# Altium PCB 0D1_(L293D).PcbDoc
Units mm, origin at the board's own origin, x right, y up, seen from the top; angles counter-clockwise.
Board outline 152.4 x 101.6 mm, 2 copper layers (Top Layer, Bottom Layer), stack 0.325 mm thick; 36 components, 27 nets, 87 pads, 5 vias.
Unrouted connection lines stored in the file: 3.
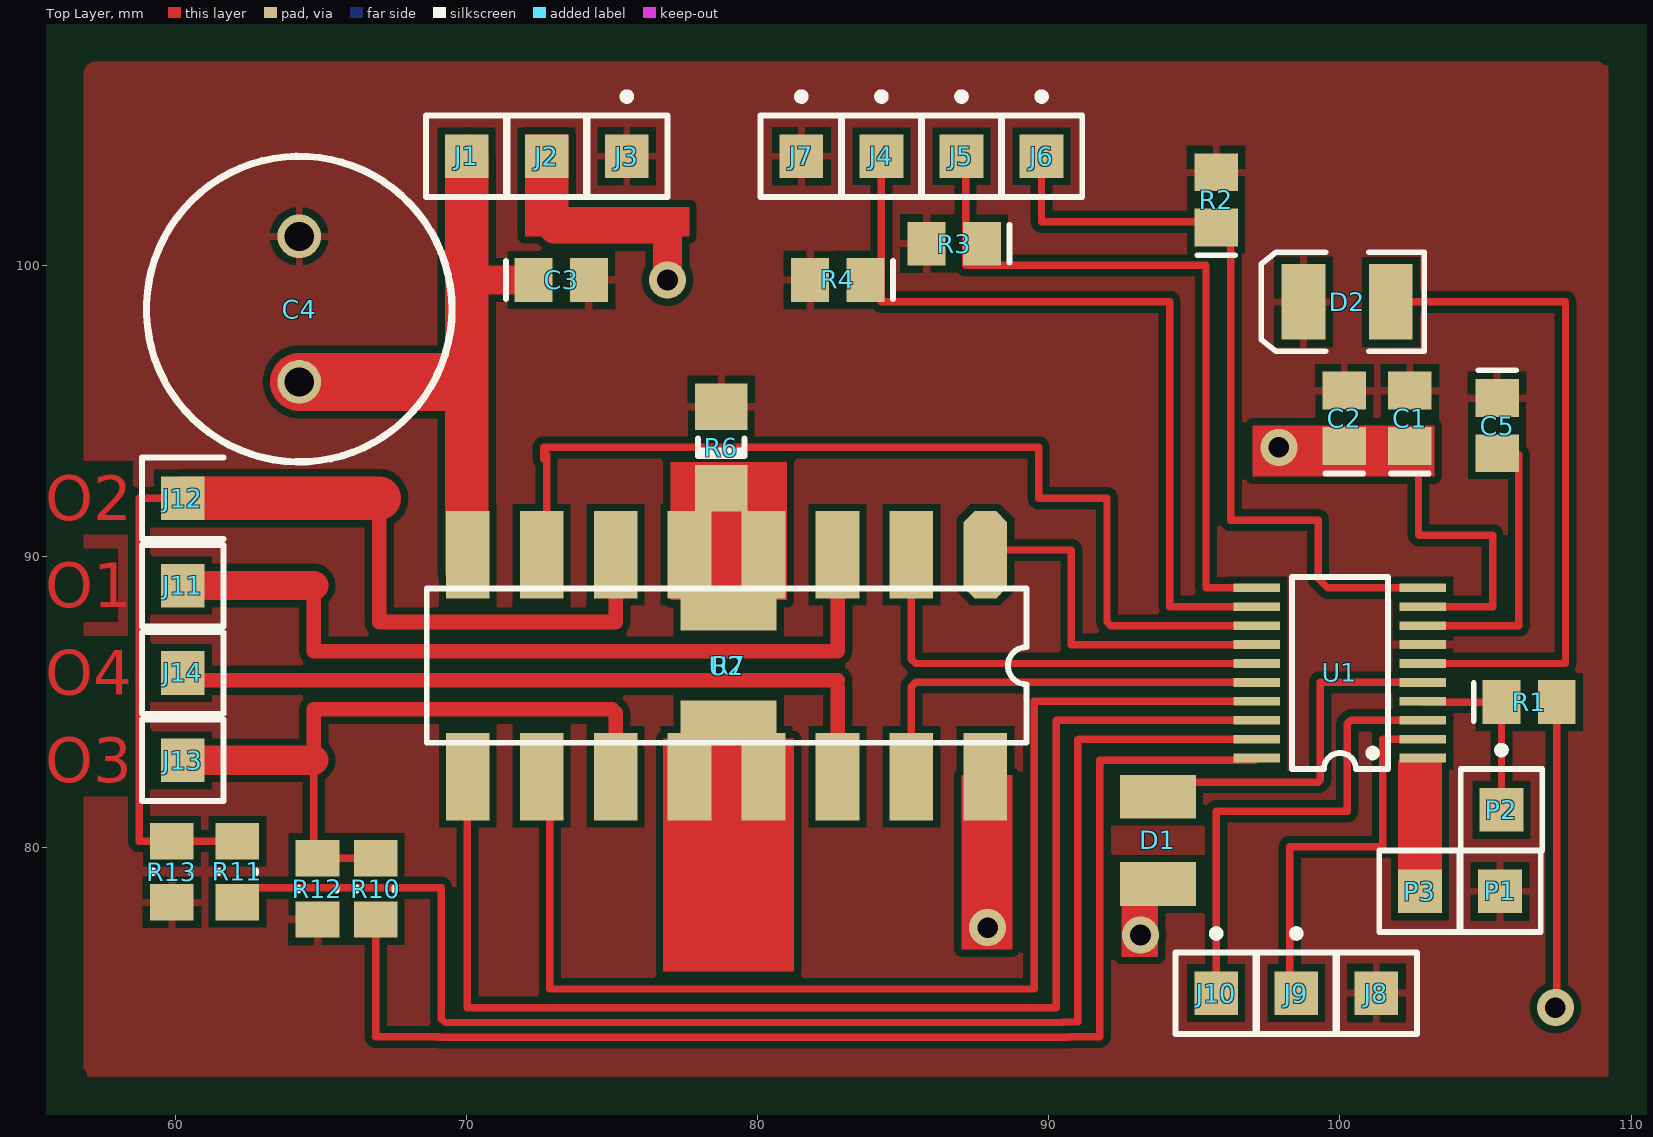
[diagram p0: Top Layer view]
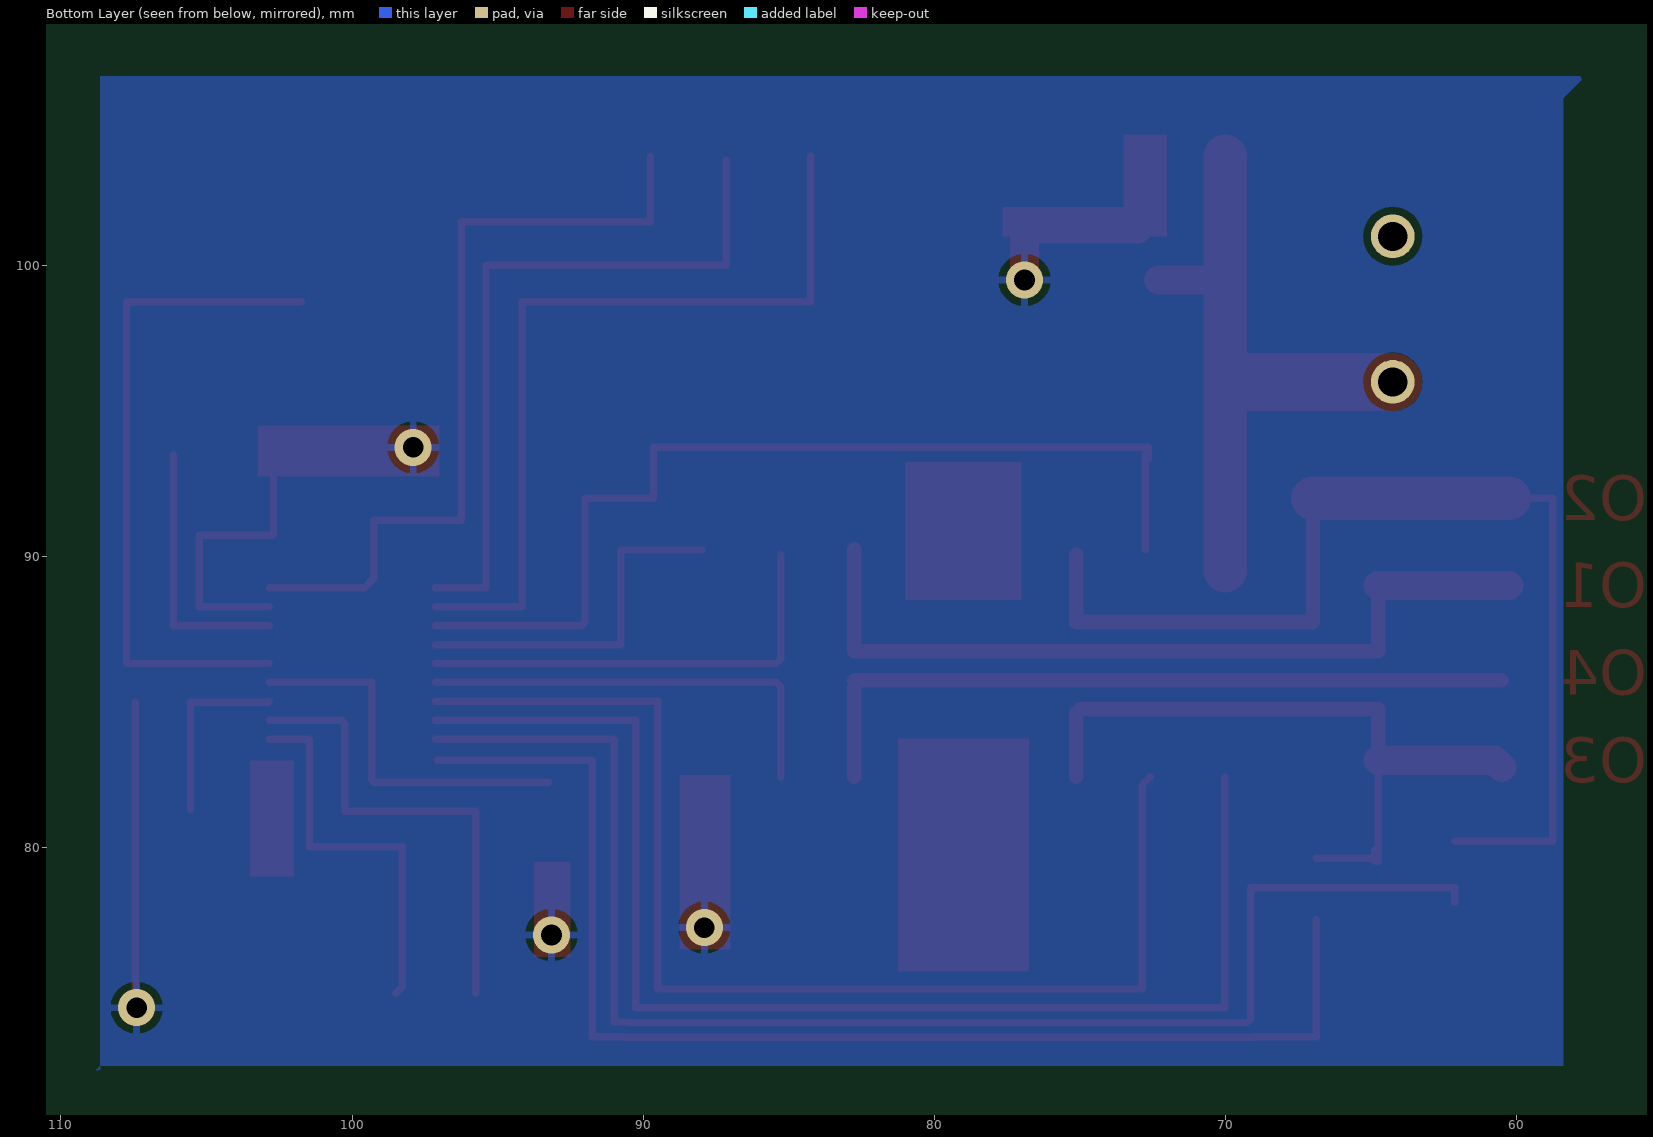
[diagram p1: Bottom Layer view, seen from below]

## Layer stack, top to bottom
Top Solder: solder mask 0.0102, Solder Resist, Dk 3.5
Top Layer: signal copper 0.0356
Dielectric1: dielectric 0.254, FR-4, Dk 4.2
Bottom Layer: signal copper 0.0356
Bottom Solder: solder mask 0.0102, Solder Resist, Dk 3.5

## Board outline
25.4,25.4 177.8,25.4 177.8,127 25.4,127

## Design rules (kind name [scope] priority, off if disabled: settings)
Clearance [All] p1: gap=0.254
PolygonConnect [All] p1: connectstyle=Relief reliefconductorwidth=0.254 reliefentries=4 polygonreliefangle="90 Angle" airgapwidth=0.254
RoomDefinition 0D1_(L293D) [InComponentClass('0D1_(L293D)')] p1: confinementstyle=ConfineIn formatcopy=TRUE lockcomponents=FALSE outline 108.75,70 56.75,70 56.75,107.5 108.75,107.5
RoutingVias [All] p1: holewidth=0.711 width=1.27 viastyle="Through Hole" minholewidth=0.711 minwidth=1.27 maxholewidth=0.711 maxwidth=1.27
SilkToSolderMaskClearance SilkscreenOverComponentPads [IsPad] p1: minsilkscreentomaskgap=0.254 clearancetoexposedcopper=TRUE
SolderMaskExpansion [All] p1: expansion=0.102
Width [All] p1: maxlimit=0.254 minlimit=0.254 preferedwidth=0.254
28 further rules are at their usual default settings.

## Components (designator, comment, footprint, x,y, rotation, side; value= is the part's Value field where it differs from the comment)
C1 "" 0805 102.4,94.75 r90 top
C2 "Cap" 0805 100.15,94.75 r90 top
C3 "Cap" 0805 73.25,99.5 r0 top
C4 "Cap Pol1" RB5-10.5 64.25,98.5 r90 top
C5 "Cap" 0805 105.4,94.5 r270 top
D1 "RED" 3.5X2.8X1.9 93.75,80.25 r270 top
D2 "GREEN" 3.5X2.8X1.9 100.25,98.75 r180 top
J1 "VCCIO 5-30V" PIN1 70,103.75 r0 top
J2 "VCC +5V" PIN1 72.75,103.75 r0 top
J3 "GND" PIN1 75.5,103.75 r0 top
J4 "STEP/SCL" PIN1 84.25,103.75 r0 top
J5 "DIR/SDA" PIN1 87,103.75 r0 top
J6 "HOLD" PIN1 89.75,103.75 r0 top
J7 "GND" PIN1 81.5,103.75 r0 top
J8 "GND" PIN1 101.25,75 r0 top
J9 "TX" PIN1 98.5,75 r0 top
J10 "RX" PIN1 95.75,75 r0 top
J11 "O1" PIN1 60.25,89 r0 top
J12 "O2" PIN1 60.25,92 r0 top
J13 "O3" PIN1 60.25,83 r0 top
J14 "O4" PIN1 60.25,86 r0 top
P1 "GND" PIN1 105.5,78.5 r0 top
P2 "RST" PIN1 105.55,81.3 r0 top
P3 "ENC" PIN1 102.75,78.5 r0 top
R1 "Res2" 0805 106.5,85 r0 top
R2 "Res2" 0805 95.75,102.25 r90 top
R3 "Res2" 0805 86.75,100.75 r180 top
R4 "Res2" 0805 82.75,99.5 r180 top
R6 "Res2" 1206 78.75,93.75 r90 top
R7 "Res2" 1812 79,86.25 r270 top
R10 "Res2" RESC0805(2012)_M 66.877,78.579 r270 top
R11 "Res2" RESC0805(2012)_M 62.123,79.171 r270 top
R12 "Res2" RESC0805(2012)_M 64.877,78.579 r270 top
R13 "Res2" RESC0805(2012)_M 59.873,79.171 r270 top
U1 "STM8S103" TSSOP20 100,86 r90 top
U2 "L293D" DIP16 78.928,86.25 r180 top

## Footprints (in the part's own frame and the unit in brackets; to place one, negate y for a bottom-side part, rotate by r counter-clockwise, add the part's x,y. Pads: shape width x height; smd on the part's side, far side on the other; paste and mask are expansions set on the pad)
3.5X2.8X1.9 [mm] "SM LED; 2 C-Bend Leads; Body 3.5 x 2.8 x 1.9 mm, inc leads (LxWxH typ)"
  rect 1.5x2.6 smd: 1(-1.5,0) 2(1.5,0)
0805 [mm] "Chip Capacitor; Body 2.0 x 1.2 mm (LxW typ)"
  rect 1.3x1.5 smd: 1(-0.95,0) 2(0.95,0)
  silkscreen extent -1.9,-0.65 -1.9,0.65
1206 [mm] "Chip Capacitor; Body 3.2 x 1.6 mm (LxW typ)"
  rect 1.6x1.8 smd: 1(-1.4,0) 2(1.4,0)
  silkscreen extent -0.3,-0.8 0.3,0.8
1812 [mm] "Chip Capacitor, Body 4.5x3.2mm, IPC High Density"
  rect 1.4x3.3 smd: 1(-1.9,0) 2(1.9,0)
DIP16 [mm] "DIP; 16 Leads; Row Spacing 7.62 mm; Pitch 2.54 mm"
  oct 1.5x3 smd: 1(-8.89,-3.81)
  rect 1.5x3 smd: 2(-6.35,-3.81) 3(-3.81,-3.81) 4(-1.27,-3.81) 5(1.27,-3.81) 6(3.81,-3.81) 7(6.35,-3.81) 8(8.89,-3.81) 9(8.89,3.81) 10(6.35,3.81) 11(3.81,3.81) 12(1.27,3.81) 13(-1.27,3.81) 14(-3.81,3.81) 15(-6.35,3.81) 16(-8.89,3.81)
  silkscreen extent -10.3,-2.65 10.3,2.65
PIN1 [mm] "Connector; Plug"
  rect 1.5x1.5 smd: 1(0,0)
  silkscreen extent -1.4,-1.4 1.4,1.4
RB5-10.5 [mm] "Capacitor (Radial); 2 Leads"
  round 1.5 hole 1: 1(-2.5,0)
  round 1.5 hole 1 unplated: 2(2.5,0)
  silkscreen extent -5.25,-5.25 5.25,5.25
RESC0805(2012)_M [mm] "Chip Resistor, Body 2.0x1.3mm, IPC Low Density"
  rect 1.25x1.5 smd: 1(-1.05,0) 2(1.05,0)
  silkscreen extent -0.05,-0.65 0.05,0.65
TSSOP20 [mm] "Shrink Small Outline; 20 Leads; Body Width 4.4 mm; Pitch 0.65 mm"
  rect 0.3x1.6 smd: 1(-2.925,-2.85) 2(-2.275,-2.85) 3(-1.625,-2.85) 4(-0.975,-2.85) 5(-0.325,-2.85) 6(0.325,-2.85) 7(0.975,-2.85) 8(1.625,-2.85) 9(2.275,-2.85) 10(2.925,-2.85) 11(2.925,2.85) 12(2.275,2.85) 13(1.625,2.85) 14(0.975,2.85) 15(0.325,2.85) 16(-0.325,2.85) 17(-0.975,2.85) 18(-1.625,2.85) 19(-2.275,2.85) 20(-2.925,2.85)
  silkscreen extent -3.3,-1.65 3.3,1.65

## Part data
C1: library part "Cap Pol2", "Polarized Capacitor (Axial)"
C2 C3 C5: "Capacitor"
C4: "Polarized Capacitor (Radial)"
D1 D2: library part LED3, "Typical BLUE SiC LED"
J1 J2 J3 J4 J5 J6 J7 J8 J9 J10 J11 J12 J13 J14: library part Socket, "Socket"
P1 P2 P3: library part Plug, "Plug"
R1 R2 R3 R4 R6 R7 R10 R11 R12 R13: "Resistor"
U2: "Push-Pull Four Channel Driver With Diode"

## Via types
v1: diameter 1.27, hole 0.711, Top Layer to Bottom Layer, 5 vias

## Nets (pads, with @x,y where several pads share a name; then routed paths per layer and width w, separated by ;. In a path a pad name is that pad's centre, name@x,y a point inside that pad or via, vN(x,y) a via of type N, cw(c..) or ccw(c..) an arc to the next point about the centre after c; other vN are vias at no path point)
GND: C1.2 C2.2 C3.2 C4.2 C5.1 D2.2 J3.1 J7.1 J8.1 P1.1 R2.2 R3.2 R4.2 R6.2 R12.2 R13.2 U1.7
NetC5_2: C5.2 U1.8 | length 9.2
  Top Layer w0.254: U1.8 106.15,87.625 C5.2@106.15,93.5
NetD1_1: D1.1 U1.5 | length 13
  Top Layer w0.254: D1.1@93.25,82.25 99.25,82.25 99.325,82.325 99.325,85.675 U1.5
NetD2_1: D2.1 U1.6 | length 23.3
  Top Layer w0.254: D2.1 107.75,98.75 107.75,86.325 U1.6
NetJ4_1: J4.1 R4.1 U1.12 | length 28.4
  Top Layer w0.254: J4.1 84.25,98.75 94.15,98.75 94.15,88.275 U1.12
NetJ5_1: J5.1 R3.1 U1.11 | length 24.7
  Top Layer w0.254: J5.1@87.142,103.608 87.142,100 95.4,100 95.4,88.925 U1.11
NetJ6_1: J6.1 R2.1 U1.10 | length 27.7
  Top Layer w0.254: J6.1 89.75,101.5 96.25,101.5 96.25,91.25 99.25,91.25 99.25,89.25 99.575,88.925 U1.10
NetJ9_1: J9.1 U1.2 | length 13.4
  Top Layer w0.254: J9.1 98.275,75.225 98.275,80.025 101.475,80.025 101.475,83.725 U1.2
NetJ10_1: J10.1 U1.3 | length 16.4
  Top Layer w0.254: J10.1 95.75,81.25 100.25,81.25 100.25,84.25 100.375,84.375 U1.3
NetJ11_1: J11.1 U2.3 | length 28.2
  Top Layer w0.5: 64.75,89 64.75,86.75 82.75,86.75 U2.3@82.75,90.25
  Top Layer w1: J11.1 64.75,89
NetJ12_1: J12.1 R11.1 R13.1 U2.6 | length 38
  Top Layer w0.254: 58.75,80.221 58.75,91.99 58.76,92 J12.1 ; 58.779,80.221 R13.1 R11.1
  Top Layer w0.5: 67,92 67,87.75 75.118,87.75 U2.6
  Top Layer w1.5: J12.1 67,92
NetJ13_1: J13.1 R10.1 R12.1 U2.11 | length 24.6
  Top Layer w0.254: R12.1@64.75,79.529 64.75,83 ; R12.1@64.877,79.927 64.877,79.529 64.977,79.629 R10.1 ; 75,84.75 75.118,84.632
  Top Layer w0.5: 64.75,83 64.75,84.75 75,84.75 ; U2.11 75.118,84.632
  Top Layer w1: J13.1@60.5,82.75 60.75,83 64.75,83
NetJ14_1: J14.1 U2.14 | length 25.3
  Top Layer w0.5: J14.1@60.5,85.75 82.75,85.75 ; U2.14@82.75,82.44 82.75,85.5
NetP2_1: P2.1 R1.1 U1.4 | length 6.4
  Top Layer w0.254: U1.4 102.875,85 R1.1 P2.1
NetP3_1: P3.1 U1.1
NetR6_1: R6.1 R7.2 U2.12 U2.13
NetR7_1: R7.1 U2.4 U2.5
NetR10_2: R10.2 U1.20 | length 43.7
  Top Layer w0.254: R10.2 66.877,73.5 69.032,73.5 69.048,73.484 90.671,73.484 90.687,73.5 91.75,73.5 91.75,83 U1.20@97.075,83
NetR11_2: R11.2 U1.19 | length 49.8
  Top Layer w0.254: R11.2 62.123,78.623 69.127,78.623 69.127,74.123 69.258,73.992 90.5,73.992 ; 90.5,74.008 91,74.008 91,83.7 91.025,83.725 U1.19
NetU1_13: U1.13 U2.7 | length 34.2
  Top Layer w0.254: 72.65,93.35 72.65,93.75 89.65,93.75 89.65,92 92,92 92,87.75 92.125,87.625 U1.13 ; U2.7@72.75,90.232 72.75,93.5
NetU1_14: U1.14 U2.1 | length 12.4
  Top Layer w0.254: U2.1@87.983,90.225 90.775,90.225 90.775,86.975 U1.14
NetU1_15: U1.15 U2.2 | length 15.5
  Top Layer w0.254: U2.2 85.278,86.472 85.425,86.325 U1.15
NetU1_16: U1.16 U2.15 | length 15
  Top Layer w0.254: U2.15 85.278,85.528 85.425,85.675 U1.16
NetU1_17: U1.17 U2.10 | length 41.6
  Top Layer w0.254: U2.10 72.858,82.16 72.858,75.142 89.5,75.142 89.5,85.025 U1.17
NetU1_18: U1.18 U2.9 | length 44.9
  Top Layer w0.254: U2.9@70.025,82.427 70.025,74.5 90.25,74.5 90.25,84.375 U1.18
VCC: C1.1 C2.1 D1.2 J2.1 R1.2 U1.9 U2.16 | length 29.1
  Top Layer w0.254: 72.75,101.5 73,101.25 ; C1.1@102.7,93.75 102.7,90.75 102.725,90.725 105.25,90.725 105.25,88.275 U1.9 ; v1@107.45,74.55 R1.2
  Top Layer w1: 72.75,101.5 J2.1 ; 73,101.25 76.9,101.25 v1(76.9,99.5)
  other v1: 107.4,74.5 93.15,77 87.9,77.25 97.9,93.75
VCCIO: C3.1 C4.1 J1.1 U2.8 | length 22
  Top Layer w1: 70,99.5 C3.1
  Top Layer w1.5: U2.8@70,89.522 70,99.5 J1.1
  Top Layer w2: C4.1 69.75,96

## Polygon pours and split planes (outlines as drawn)
VCC on Bottom Layer "Bottom Layer-No Net" (solid, pour order 3): 108.65,72.25 108.65,106.5 57.65,106.5 58.4,105.739 58.4,72.504 108.65,72.504 108.9,72.25
GND on Top Layer "Bottom Layer-No Net" (solid, pour order 5): 109.221,72.132 109.221,107 56.844,107 56.844,72.132

## Other copper
Top Layer:
  rectangle net NetR6_1: 77,88.5 81,93.25
  rectangle net VCC: 92.5,76.25 93.75,79.5
  rectangle net VCC: 72,101 77.65,102
  rectangle net VCC: 72,101 73.5,104.5
  rectangle net VCC: 97,92.75 103.25,94.5
  rectangle net GND: 76.75,75.75 81.25,83.75
  rectangle net VCC: 87,76.5 88.75,82.5
  rectangle net NetP3_1: 102,79 103.5,83

## Dimensions
56.844,107 to 56.844,72.132 on Top Layer
109.221,107 to 56.844,107 on Top Layer